# Altium PCB 7seg.PcbDoc
Units mm, origin at the board's own origin, x right, y up, seen from the top; angles counter-clockwise.
Board outline 55 x 30 mm, 2 copper layers (Top Layer, Bottom Layer); 10 components, 20 nets, 40 pads, 6 vias.
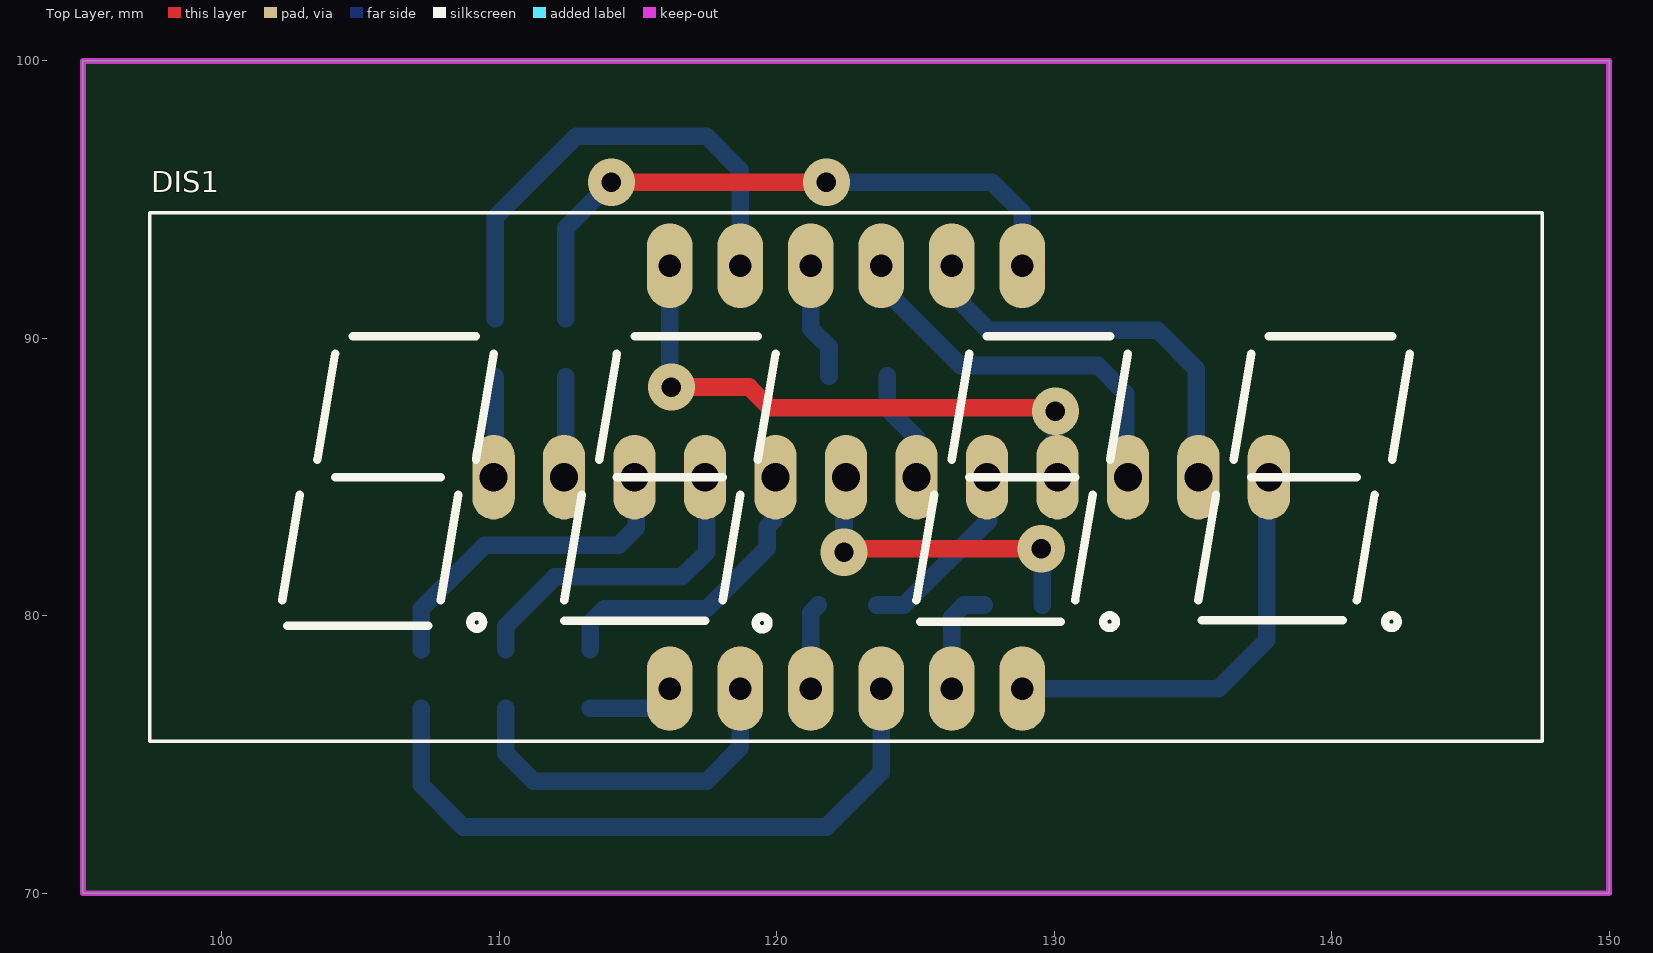
[diagram p0: Top Layer view]
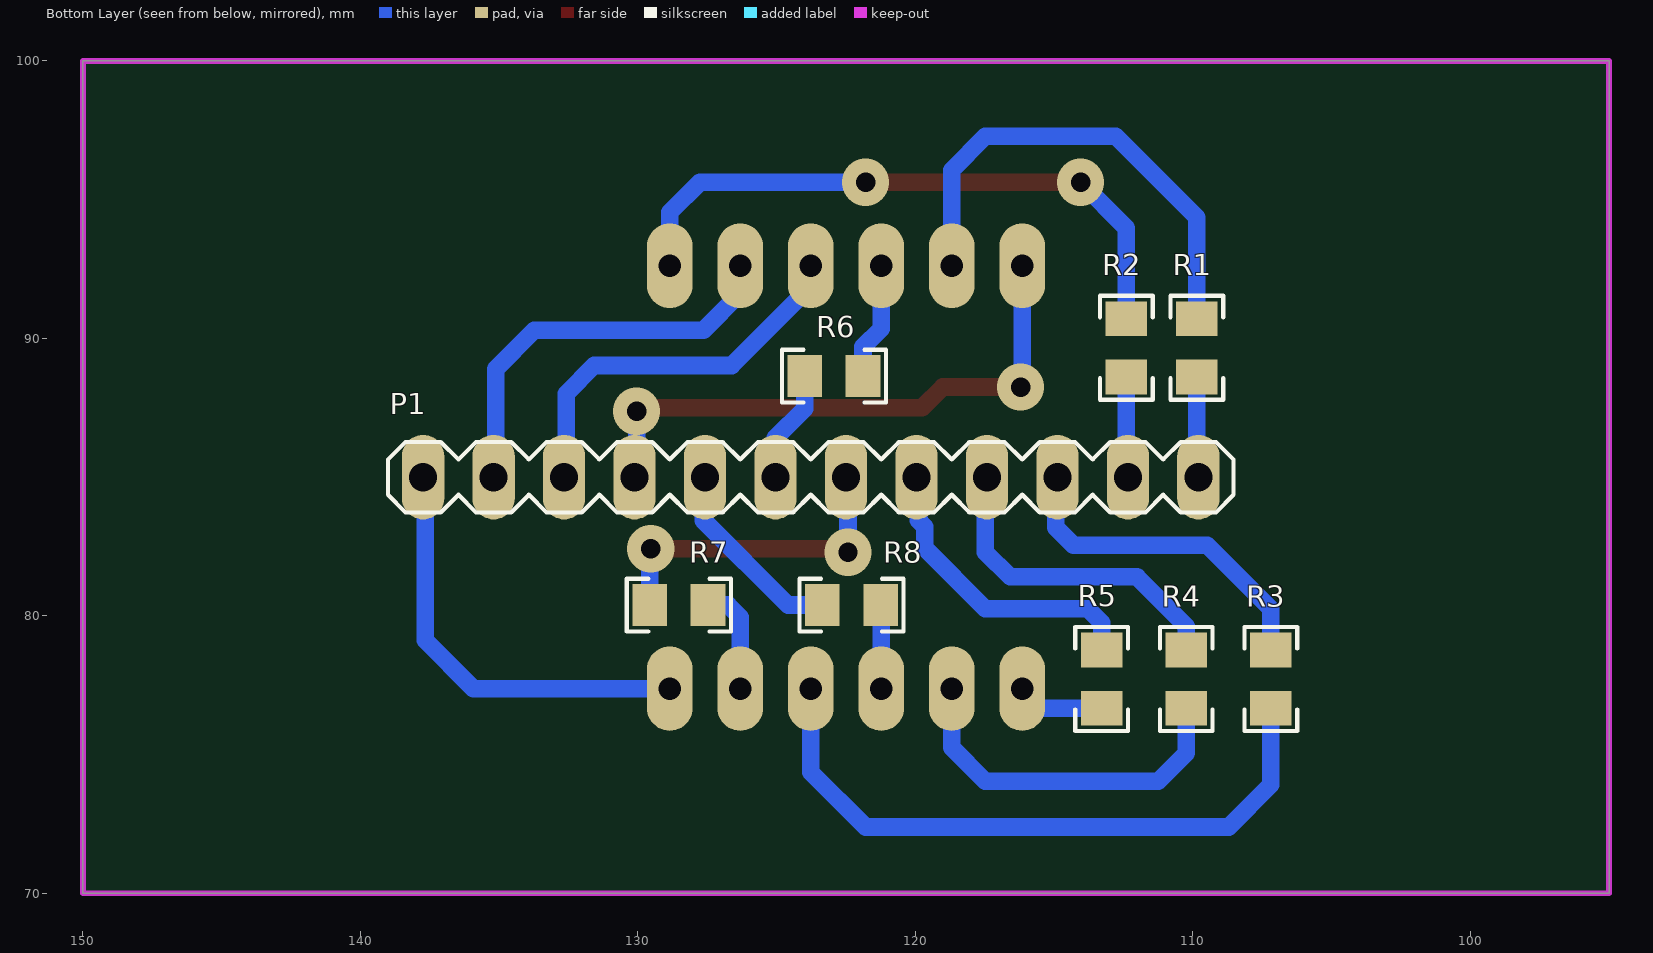
[diagram p1: Bottom Layer view, seen from below]

## Layer stack, top to bottom
Top Layer: signal copper 0.0356
Dielectric: dielectric 0.32, FR-4, Dk 4.8
Bottom Layer: signal copper 0.0356

## Board outline
95,70 150,70 150,100 95,100

## Design rules (kind name [scope] priority, off if disabled: settings)
Clearance [All] p1: gap=0.254
ComponentClearance [All] p1 off: gap=0.254 collisioncheckmode=3 verticalgap=0.254 showdistances=FALSE
PolygonConnect [All] p1: connectstyle=Relief reliefconductorwidth=0.254 reliefentries=4 polygonreliefangle="90 Angle" airgapwidth=0.254
RoutingVias [All] p1: holewidth=0.7 width=1.6 viastyle="Through Hole" minholewidth=0.7 minwidth=1.6 maxholewidth=0.7 maxwidth=1.6
SolderMaskExpansion [All] p1: expansion=0.102
Width [All] p1: maxlimit=0.635 minlimit=0.508 preferedwidth=0.635 minimp=50.000000 maximp=50.000000 favimp=50.000000
27 further rules are at their usual default settings.

## Components (designator, comment, footprint, x,y, rotation, side; value= is the part's Value field where it differs from the comment)
DIS1 "OPD-Q5621LB-BW" OPD-Q5621LB-BW 122.5,85 r0 top
P1 "Header 12H" MA12-1L 123.77,85 r180 bottom
R1 "100R" R0805 109.855,89.662 r270 bottom
R2 "100R" R0805 112.395,89.662 r270 bottom
R3 "100R" R0805 107.188,77.724 r90 bottom
R4 "100R" R0805 110.236,77.724 r90 bottom
R5 "100R" R0805 113.284,77.724 r90 bottom
R6 "100R" R0805 122.936,88.646 r0 bottom
R7 "100R" R0805 128.524,80.391 r0 bottom
R8 "100R" R0805 122.301,80.391 r0 bottom

## Footprints (in the part's own frame and the unit in brackets; to place one, negate y for a bottom-side part, rotate by r counter-clockwise, add the part's x,y. Pads: shape width x height; smd on the part's side, far side on the other; paste and mask are expansions set on the pad)
MA12-1L [mil]
  oval 60x120 hole 40: 1(-550,0) 2(-450,0) 3(-350,0) 4(-250,0) 5(-150,0) 6(-50,0) 7(50,0) 8(150,0) 9(250,0) 10(350,0) 11(450,0) 12(550,0)
  silkscreen extent -600,-50 600,50, body extent -600,-50 600,50, height 339
OPD-Q5621LB-BW [mil]
  oval 65x120 hole 32: 1(-250,-300) 2(-150,-300) 3(-50,-300) 4(50,-300) 5(150,-300) 6(250,-300) 7(250,300) 8(150,300) 9(50,300) 10(-50,300) 11(-150,300) 12(-250,300)
  silkscreen extent -988,-375 988,375, body extent -992,-374 992,374, height 315
R0805 [mm] "Chip Resistor, Body 2.0x1.3mm, IPC Low Density"
  rect 1.25x1.5 smd: 1(-1.05,0) 2(1.05,0)
  silkscreen extent -1.88,-0.95 1.88,0.95, body extent -1.1,-0.67 1.1,0.67, height 0.7

## Part data
DIS1: "Wyœwietlacz: LED; 7-segmentowy; 14,2mm; niebieski; 80mcd; katoda"
P1: "Header, 12-Pin, Right Angle"
R1 R2 R3 R4 R5 R6 R7 R8: library part Res, "Resistor"

## Via types
v1: diameter 1.7, hole 0.7, Top Layer to Bottom Layer, 6 vias

## Nets (pads, with @x,y where several pads share a name; then routed paths per layer and width w, separated by ;. In a path a pad name is that pad's centre, name@x,y a point inside that pad or via, vN(x,y) a via of type N, cw(c..) or ccw(c..) an arc to the next point about the centre after c; other vN are vias at no path point)
A: P1.12 R1.2 | length 3.4
  Bottom Layer w0.635: P1.12@109.855,85.217 R1.2
B: P1.11 R2.2 | length 3.4
  Bottom Layer w0.635: P1.11@112.395,85.217 R2.2
C: P1.10 R3.2 | length 12.2
  Bottom Layer w0.635: R3.2 107.188,80.264 109.474,82.55 114.3,82.55 114.935,83.185 P1.10@114.935,84.963
CC1: DIS1.6 P1.1 | length 15.8
  Bottom Layer w0.635: DIS1.6 135.927,77.38 137.668,79.121 P1.1@137.668,85.344
CC2: DIS1.8 P1.2 | length 14.8
  Bottom Layer w0.635: DIS1.8 126.31,91.622 127.635,90.297 133.731,90.297 135.128,88.9 P1.2@135.128,85.09
CC3: DIS1.9 P1.3 | length 14
  Bottom Layer w0.635: DIS1.9 123.77,91.876 126.619,89.027 131.572,89.027 132.588,88.011 P1.3@132.588,85.217
CC4: DIS1.12 P1.4 | length 21
  Top Layer w0.635: v1(116.205,88.248) 119.016,88.248 119.761,87.503 129.921,87.503 v1(130.048,87.376)
  Bottom Layer w0.635: DIS1.12 116.15,88.193 v1(116.205,88.248) ; P1.4@130.048,85.09 v1(130.048,87.376)
D: P1.9 R4.2 | length 11.9
  Bottom Layer w0.635: R4.2 110.236,79.629 112.014,81.407 116.586,81.407 117.475,82.296 P1.9@117.475,84.963
DP: P1.5 R8.2 | length 6.8
  Bottom Layer w0.635: R8.2@123.605,80.391 124.587,80.391 127.635,83.439 P1.5@127.635,84.963
E: P1.8 R5.2 | length 11.1
  Bottom Layer w0.635: R5.2 113.284,79.756 113.792,80.264 117.475,80.264 119.659,82.448 119.659,83.22 119.888,83.448 P1.8@119.888,84.963
F: P1.6 R6.2 | length 4.1
  Bottom Layer w0.635: R6.2 123.986,87.469 125.04,86.415 P1.6
G: P1.7 R7.2 | length 12.6
  Top Layer w0.635: v1@122.428,81.915 v1(122.428,82.296) 122.555,82.423 v1(129.54,82.423)
  Bottom Layer w0.635: v1@122.428,81.915 v1(122.428,82.296) 122.428,84.709 P1.7@122.555,84.836 ; v1@129.54,82.389 v1(129.54,82.423) ; R7.2 v1@129.574,82.389
NetDIS1_1: DIS1.1 R5.1 | length 2.2
  Bottom Layer w0.635: R5.1 DIS1.1@115.444,76.674
NetDIS1_2: DIS1.2 R4.1 | length 13.1
  Bottom Layer w0.635: R4.1 110.236,75.057 111.252,74.041 117.475,74.041 118.69,75.256 DIS1.2
NetDIS1_3: DIS1.3 R8.1 | length 3.1
  Bottom Layer w0.635: DIS1.3 121.23,80.116 R8.1@121.505,80.391
NetDIS1_4: DIS1.4 R3.1 | length 23.8
  Bottom Layer w0.635: R3.1 107.188,73.914 108.712,72.39 121.793,72.39 123.77,74.367 DIS1.4
NetDIS1_5: DIS1.5 R7.1 | length 3.9
  Bottom Layer w0.635: DIS1.5 126.31,79.955 126.746,80.391 R7.1
NetDIS1_7: DIS1.7 R2.1 | length 22.8
  Top Layer w0.635: v1(114.046,95.631) v1(121.793,95.631)
  Bottom Layer w0.635: R2.1 112.395,93.98 v1(114.046,95.631) ; v1(121.793,95.631) 127.762,95.631 128.85,94.543 DIS1.7
NetDIS1_10: DIS1.10 R6.1 | length 4.2
  Bottom Layer w0.635: DIS1.10 121.23,90.352 121.886,89.696 R6.1
NetDIS1_11: DIS1.11 R1.1 | length 17.6
  Bottom Layer w0.635: R1.1 109.855,94.361 112.776,97.282 117.475,97.282 118.69,96.067 DIS1.11

## Keep-outs
Keep-Out Layer:
  lines w0.2: 122,70 123,70 ; 95,70 150,70 150,100 95,100 95,70

## Dimensions
150,70 to 150,100 on Keep-Out Layer
95,70 to 150,70 on Keep-Out Layer